# Altium PCB PCB_EmbeddedSystemDesign.PcbDoc
Units mm, origin at the board's own origin, x right, y up, seen from the top; angles counter-clockwise.
Board outline 63.31 x 64.64 mm, 2 copper layers (Top Layer, Bottom Layer); 49 components, 29 nets, 158 pads, 0 vias.
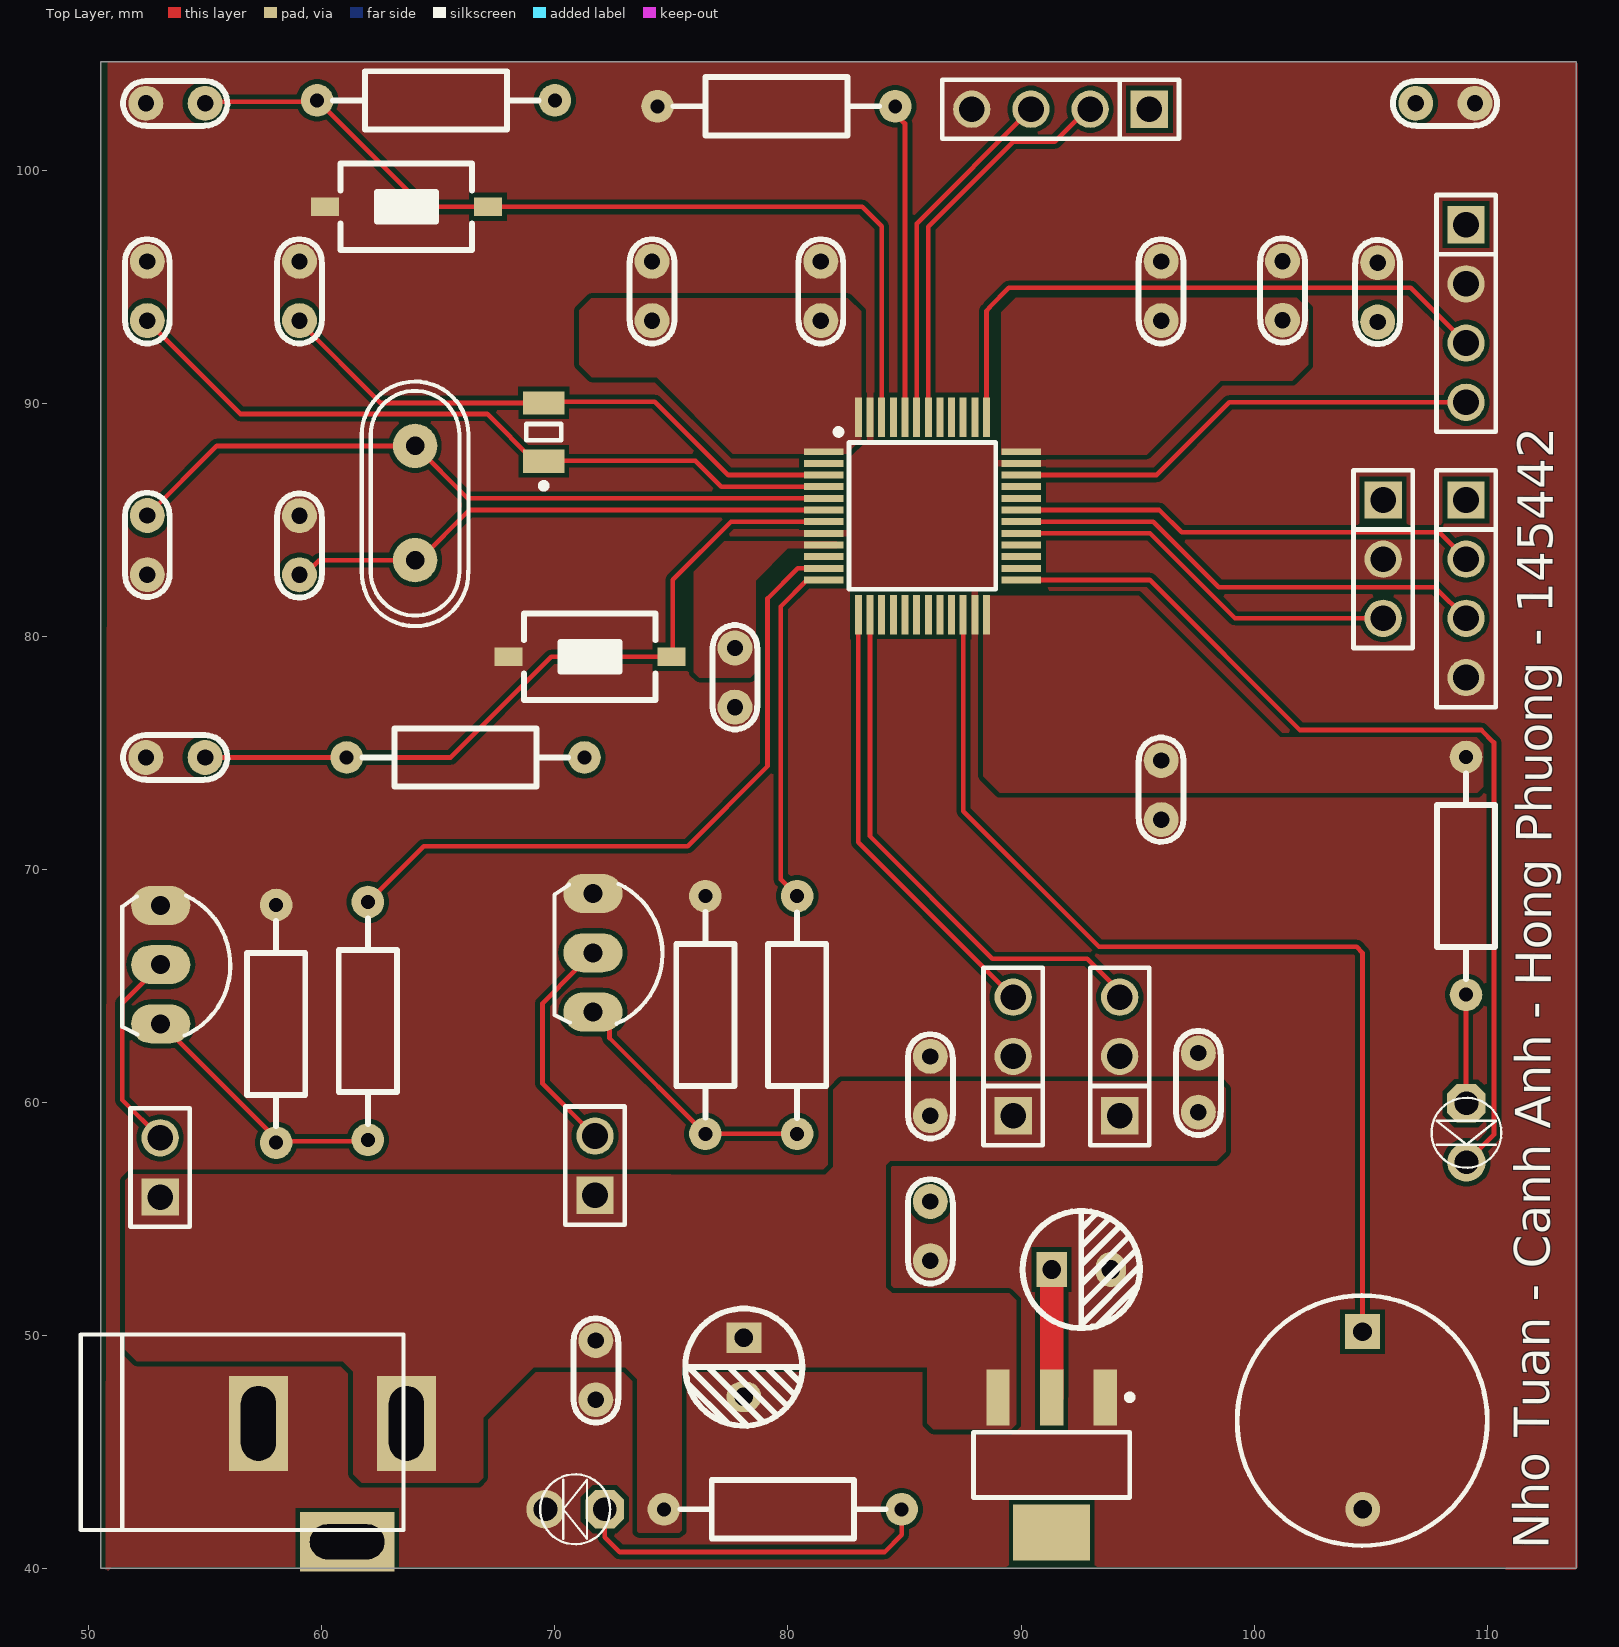
[diagram p0: Top Layer view]
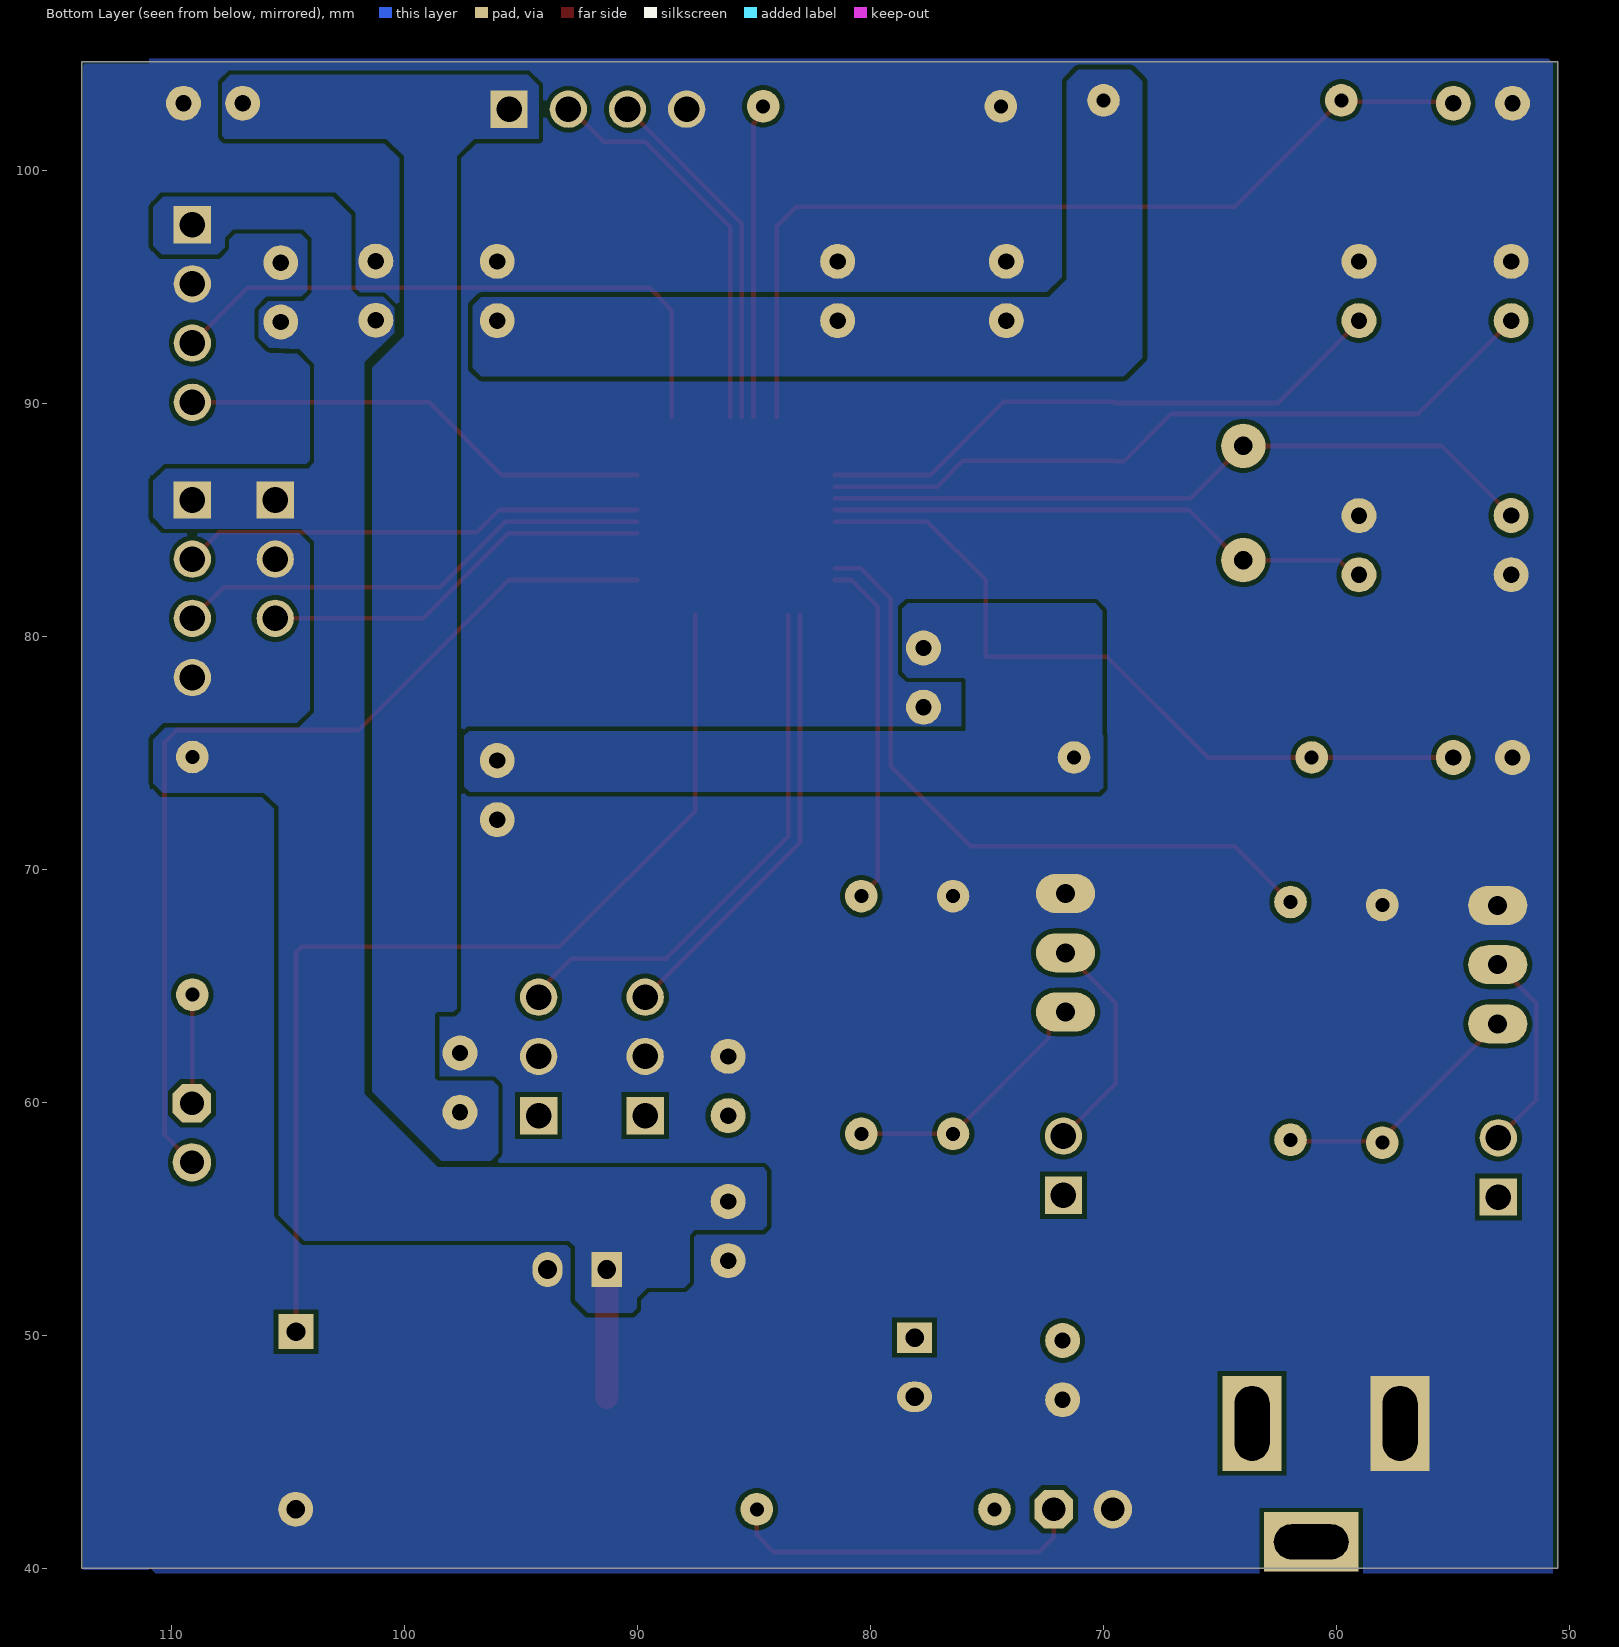
[diagram p1: Bottom Layer view, seen from below]
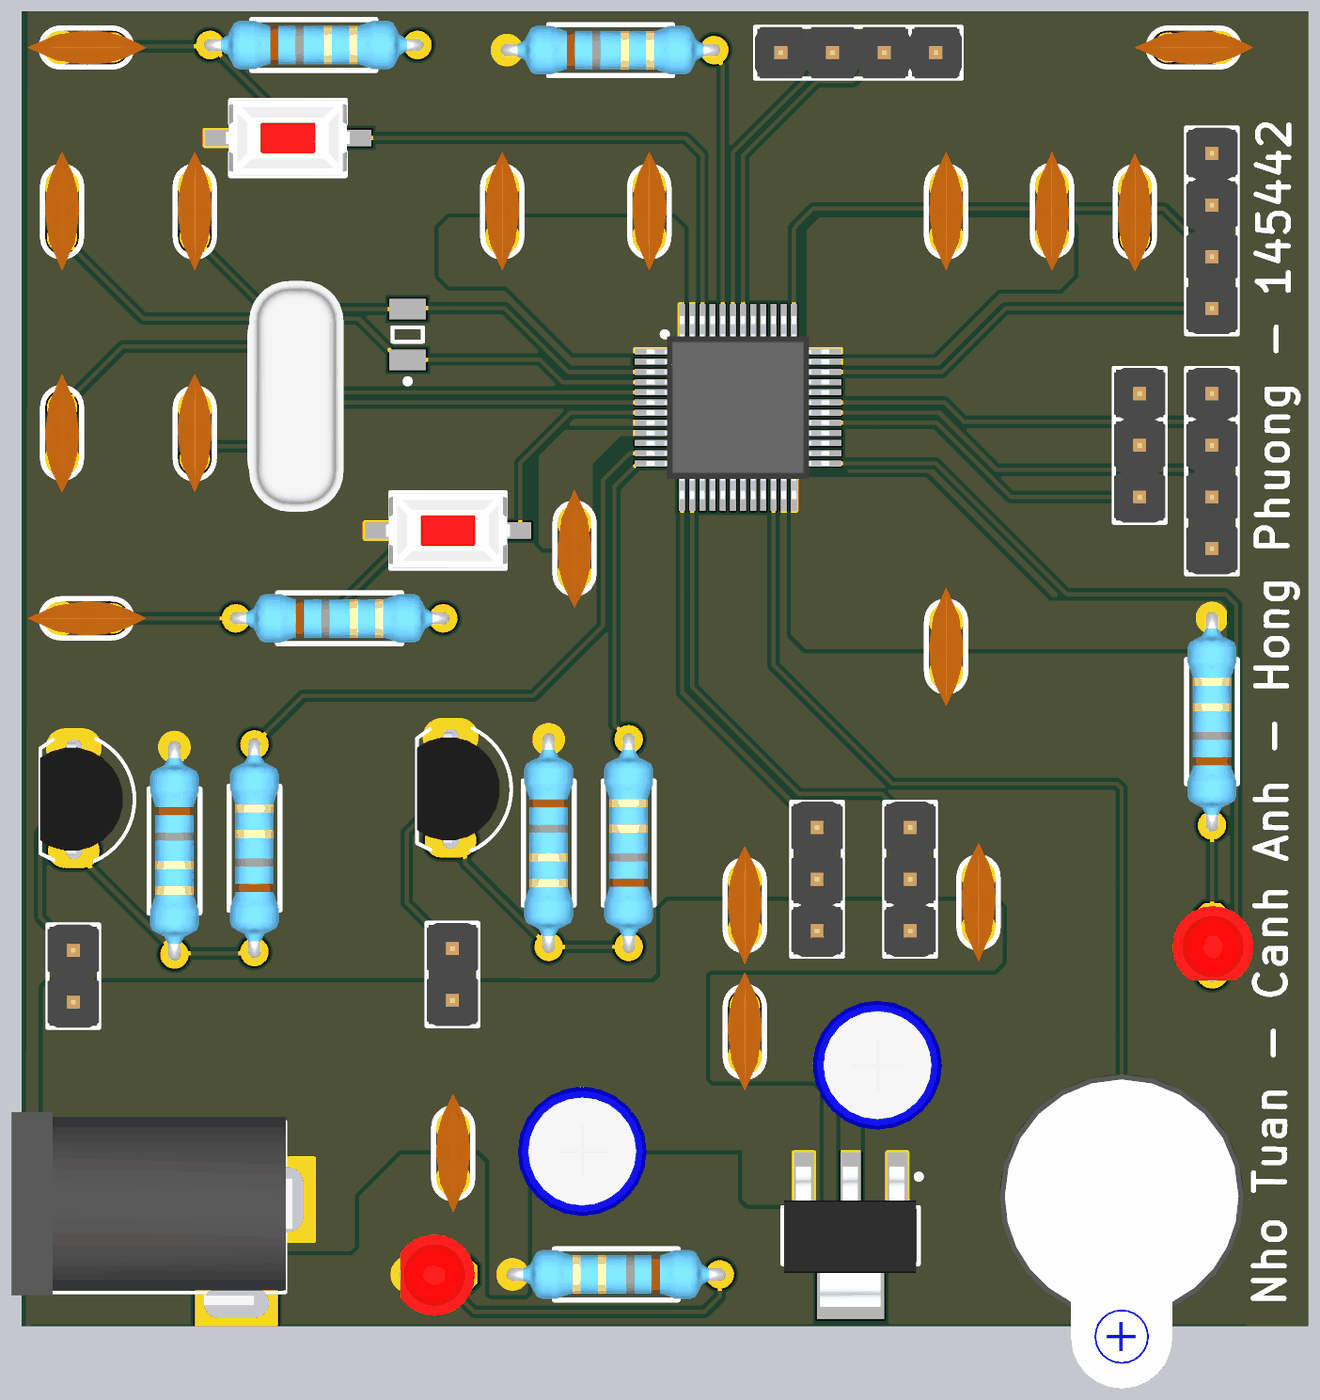
[diagram p2: 3D render of the assembled board from above, using the file's embedded part models]

## Layer stack, top to bottom
Top Solder: solder mask 0.0102, Solder Resist, Dk 3.5
Top Layer: signal copper 0.0356
Dielectric 1: dielectric 0.32, FR-4, Dk 4.8
Bottom Layer: signal copper 0.0356
Bottom Solder: solder mask 0.0102, Solder Resist, Dk 3.5

## Board outline
50.52,40.005 113.83,40.005 113.83,56.166 113.83,88.487 113.83,104.648 50.52,104.648

## Design rules (kind name [scope] priority, off if disabled: settings)
Clearance [All] p1: gap=0.2 ignorepadtopadclearanceinfootprint=FALSE
HoleSize [All] p1: absolutevalues=TRUE maxlimit=10 minlimit=0.2 maxpercent=80.000 minpercent=20.000
HoleToHoleClearance [All] p1: gap=0 allowstackedmicrovias=TRUE
MinimumSolderMaskSliver [All] p1: minsoldermaskwidth=0
PlaneClearance [All] p1: clearance=0.3
PolygonConnect [All] p1: connectstyle=Direct reliefconductorwidth=0.254 reliefentries=4 polygonreliefangle="90 Angle" airgapwidth=0.254
RoutingVias [All] p1: holewidth=0.3 width=0.6 viastyle="Through Hole" minholewidth=0.3 minwidth=0.2 maxholewidth=0.3 maxwidth=0.3
SilkToSilkClearance [All] p1: silktosilkclearance=0
SilkToSolderMaskClearance [IsPad] p1: minsilkscreentomaskgap=0 clearancetoexposedcopper=TRUE
SolderMaskExpansion [All] p1: expansion=0.102 istentingtop=FALSE
Width [All] p1: maxlimit=1 minlimit=0.2 preferedwidth=0.7
24 further rules are at their usual default settings.

## Classes and differential pairs
component class SchEmbeddedSystemDesign: C13 C18 X1 Y1

## Components (designator, comment, footprint, x,y, rotation, side; value= is the part's Value field where it differs from the comment)
BT1 "" "Nut Nhan 2 Chan SMD 3x6x2.5" 63.627,98.425 r0 top
BT2 "" "Nut Nhan 2 Chan SMD 3x6x2.5" 71.501,79.121 r0 top
C1 "" "tu gom" 86.106,60.706 r90 top
C2 "" "tu gom" 53.721,102.87 r0 top
C3 "" "tu gom" 108.204,102.87 r0 top
C4 "" "tu gom" 97.608,60.851 r90 top
C5 "" "tu gom" 81.407,94.817 r90 top
C6 "" "tu gom" 52.51,83.913 r270 top
C7 "" "tu gom" 74.168,94.817 r90 top
C8 "" "tu gom" 59.04,83.91 r90 top
C9 "" "tu gom" 96.012,94.817 r90 top
C10 "" "tu gom" 96.012,73.406 r270 top
C11 "" "tu gom" 59.04,94.817 r90 top
C12 "" "tu gom" 52.51,94.817 r90 top
C13 "" "tu gom" 77.724,78.232 r270 top
C14 "" "tu gom" 101.22,94.83 r270 top
C15 "" "tu gom" 105.3,94.76 r270 top
C16 "" "tu gom" 53.721,74.803 r0 top
C17 "" "tu hoa 5mm" 78.105,48.641 r270 top
C18 "" "tu hoa 5mm" 92.583,52.832 r0 top
C19 "" "tu gom" 71.755,48.514 r90 top
C20 "" "tu gom" 86.106,54.483 r90 top
IC1 "" SOT223-4N 91.313,44.45 r270 top value=LM317
"JACK DC1" "" "JACK DC 5.5" 60.452,43.688 r0 top value="Jac DC"
JP1 "" "JP 1x3 DT" 105.537,85.852 r270 top
JP2 "" "JP 1x3 DT" 89.662,59.436 r90 top
JP3 "" "JP 1x4 DT" 109.093,85.852 r270 top
JP4 "" "JP 1x4 DT" 95.504,102.616 r180 top
JP5 "" "JP 1x3 DT" 94.234,59.436 r90 top
JP6 "" "JP 1x2 DT" 53.06,55.94 r90 top
JP7 "" "JP 1x2 DT" 71.72,56.02 r90 top
JP8 "" "JP 1x4 DT" 109.093,97.663 r270 top
L1 "" LED-3MM-RED 109.11,59.97 r270 top
L2 "" LED-3MM-RED 72.136,42.545 r180 top
LS1 "" "Coi Chip Speacker" 104.648,50.165 r270 top
Q1 "" TO92 53.086,65.913 r270 top value=C9014
Q2 "" TO92 71.628,66.421 r270 top value=C9014
R1 "" "tro vach 1/4w" 64.897,102.997 r180 top
R2 "" "tro vach 1/4w" 79.502,102.743 r180 top
R3 "" "tro vach 1/4w" 61.976,63.5 r270 top
R4 "" "tro vach 1/4w" 58.039,63.373 r90 top
R5 "" "tro vach 1/4w" 80.391,63.754 r270 top
R6 "" "tro vach 1/4w" 76.454,63.754 r90 top
R7 "" "tro vach 1/4w" 109.093,69.723 r270 top
R8 "" "tro vach 1/4w" 79.776,42.545 r0 top
R9 "" "tro vach 1/4w" 66.167,74.803 r180 top
U1 "" LQFP-48_19.6_393_58X11_SMD 85.769,85.17 r0 top
X1 "" XT2-32.768KHz-2_V 69.52,88.76 r90 top value=4Mhz
Y1 "" "Thach Anh 2 chan cam" 64,85.72 r90 top value=4Mhz

## Footprints (in the part's own frame and the unit in brackets; to place one, negate y for a bottom-side part, rotate by r counter-clockwise, add the part's x,y. Pads: shape width x height; smd on the part's side, far side on the other; paste and mask are expansions set on the pad)
"Coi Chip Speacker" [mm]
  rect 1.5x1.5 hole 0.8: 1(0,0)
  round 1.5 hole 0.8: 2(7.62,0.013)
  silkscreen extent -1.55,-5.38 9.18,5.36, body extent -2.22,-6 13.24,6, height 4.5
"JACK DC 5.5" [mm] "Jac DC input"
  rect 2.54x4.064 hole 1.5 slot 3.2 at 90 deg: 1(3.175,2.54) 2(-3.175,2.54)
  rect 4.064x2.54 hole 1.5 slot 3.2 at 0 deg: 3(0.635,-2.54)
  silkscreen extent -10.79,-2.03 3.05,6.35, body extent -10.42,-2.67 3.4,6.84, height 11.02
"JP 1x2 DT" [mm] "2 pins, 1 row, straight, gold plating"
  rect 1.6x1.6 hole 1.1: 1(0,0)
  round 1.6 hole 1.1: 2(2.54,0)
  silkscreen extent -1.27,-1.27 3.81,1.27, body extent -1.27,-1.27 3.81,1.27, height 8.54
"JP 1x3 DT" [mm]
  rect 1.6x1.6 hole 1.1: 1(0,0)
  round 1.6 hole 1.1: 2(2.54,0) 3(5.08,0)
  silkscreen extent -1.27,-1.27 6.35,1.27, body extent -1.27,-1.27 6.35,1.27, height 8.54
"JP 1x4 DT" [mm] "4 pins, 1 row, straight, gold plating"
  rect 1.6x1.6 hole 1.1: 1(0,0)
  round 1.6 hole 1.1: 2(2.54,0) 3(5.08,0) 4(7.62,0)
  silkscreen extent -1.27,-1.27 8.89,1.27, body extent -1.27,-1.27 8.89,1.27, height 8.54
LED-3MM-RED [mil]
  oct 65x65 hole 40: 1(0,0)
  round 65 hole 40: 2(100,0)
  silkscreen extent -9,-59 109,59, body extent -27,-77 117,80, height 181
LQFP-48_19.6_393_58X11_SMD [mm] "48LQFP"
  rect 1.7x0.3 smd mask+0.076: 1(-4.238,2.75) 2(-4.238,2.25) 3(-4.238,1.75) 4(-4.238,1.25) 5(-4.238,0.75) 6(-4.238,0.25) 7(-4.238,-0.25) 8(-4.238,-0.75) 9(-4.238,-1.25) 10(-4.238,-1.75) 11(-4.238,-2.25) 12(-4.238,-2.75) 25(4.238,-2.75) 26(4.238,-2.25) 27(4.238,-1.75) 28(4.238,-1.25) 29(4.238,-0.75) 30(4.238,-0.25) 31(4.238,0.25) 32(4.238,0.75) 33(4.238,1.25) 34(4.238,1.75) 35(4.238,2.25) 36(4.238,2.75)
  rect 0.3x1.7 smd mask+0.076: 13(-2.75,-4.238) 14(-2.25,-4.238) 15(-1.75,-4.238) 16(-1.25,-4.238) 17(-0.75,-4.238) 18(-0.25,-4.238) 19(0.25,-4.238) 20(0.75,-4.238) 21(1.25,-4.238) 22(1.75,-4.238) 23(2.25,-4.238) 24(2.75,-4.238) 37(2.75,4.238) 38(2.25,4.238) 39(1.75,4.238) 40(1.25,4.238) 41(0.75,4.238) 42(0.25,4.238) 43(-0.25,4.238) 44(-0.75,4.238) 45(-1.25,4.238) 46(-1.75,4.238) 47(-2.25,4.238) 48(-2.75,4.238)
  silkscreen extent -3.72,-3.15 3.15,3.72, body extent -4.5,-4.5 4.5,4.5, height 1.7
"Nut Nhan 2 Chan SMD 3x6x2.5" [mm] "Switch SMD type"
  rect 1.2x0.8 smd: 1(-3.5,0) 2(3.5,0)
  silkscreen extent -2.82,-1.85 2.82,1.85, body extent -3.05,-1.85 3.05,1.85, height 2.5
SOT223-4N [mm] "SOT223, 4-Leads, Body 6.5x3.5mm, Pitch 2.3mm, Lead Span 7mm, IPC Medium Density"
  rect 2.4x1 smd: 1(-2.9,2.3) 2(-2.9,0) 3(-2.9,-2.3)
  rect 2.4x3.3 smd: 4(2.9,0)
  silkscreen extent -3.02,-3.35 1.4,3.48, body extent -3.39,-3.27 3.5,3.23, height 1.72
"Thach Anh 2 chan cam" [mm]
  round 1.905 hole 0.8: 1(-2.45,0) 2(2.45,0)
  silkscreen extent -5.28,-2.29 5.21,2.29, body extent -5.68,-2.36 5.68,2.29, height 3.5
TO92 [mil] "TO-92"
  oval 66x100 hole 32: 1(-100,0) 2(0,0) 3(100,0)
  silkscreen extent -117,-65 120,118, body extent -109,-66 109,95, height 245
"tro vach 1/4w" [mm]
  round 1.4 hole 0.6: 1(-5.1,0) 2(5.1,0)
  silkscreen extent -4.39,-1.25 4.42,1.25, body extent -5.38,-1.2 5.38,1.2, height 2.41
"tu gom" [mm] "Tu gom mini"
  round 1.5 hole 0.7: 1(-1.27,0) 2(1.27,0)
  silkscreen extent -2.25,-0.97 2.22,0.97, body extent -2.92,-0.85 2.92,0.85, height 6.12
"tu hoa 5mm" [mm]
  rect 1.3x1.5 hole 0.8: 1(-1.27,0)
  oval 1.3x1.5 hole 0.8: 2(1.27,0)
  silkscreen extent -2.51,-2.51 2.51,2.51, body extent -3.12,-3.18 3.23,3.18, height 14.55
XT2-32.768KHz-2_V [mm] "Hand Drawn, 2-Leads, Body 3.2x1.5mm, Pitch 2.5mm"
  rect 1x1.8 smd: 1(-1.25,0) 2(1.25,0)
  silkscreen extent -2.43,-0.75 0.35,0.75, body extent -1.6,-0.75 1.6,0.75, height 0.9

## Part data
BT1 BT2: library part "Nut Nhan 2 Chan SMD 3x6x2.5", "Nut Nhan 2 Chan SMD 3x6x2.5", Ma_Hang=MH001036, Ten="Nút Nhấn 2 Chân 3x6x2.5MM SMD"
C1 C2 C3 C4 C5 C7 C9 C10 C13 C14 C15 C16 C19 C20: library part "Tu gom 104 50V", "Cắm", Chung_Loai=Cắm, Don_Vi=Con, Ma_Hang=MH004761, So_Chan=2, Ten_Linh_Kien="Tụ gốm 104 100nF 50V"
C6 C8 C11 C12: library part "Tu gom 22pF 50V", "Cắm", Chung_Loai=Cắm, Don_Vi=Con, Ma_Hang=MH004771, So_Chan=2, Ten_Linh_Kien="Tụ gốm 22P 50V"
C17 C18: library part "Tu Hoa 100uF 16V 5x11", "Cắm", Chung_Loai=Cắm, Don_Vi=Con, Ma_Hang=MH008417, So_Chan=2, Ten_Linh_Kien="Tụ Hóa 100uF 16V 5x11MM"
IC1: library part LM1117, "Available in 1.8V, 2.5V, 2.85V, 3.3V, 5V, and  Adjustable Versions"
"JACK DC1": library part "JACK DC 5.5", "JACK DC 5.5"
JP1 JP2 JP5: library part "JP 1x3 2.54 Duc Thang", "Cắm", Chung_Loai=Cắm, Don_Vi=Con, Ma_Hang=MH000903, Ten_Linh_Kien="Jump Đơn Đực 2.54MM 1x40P Thẳng 11MM"
JP3 JP4 JP8: library part "JP 1x4 2.54 Duc Thang", "Cắm", Chung_Loai=Cắm, Don_Vi=Con, Ma_Hang=MH000903, Ten_Linh_Kien="Jump Đơn Đực 2.54MM 1x40P Thẳng 11MM"
JP6 JP7: library part "JP 1x2 2.54 Duc Thang", "Cắm", Chung_Loai=Cắm, Don_Vi=Con, Ma_Hang=MH000903, Ten_Linh_Kien="Jump Đơn Đực 2.54MM 1x40P Thẳng 11MM"
L1 L2: library part "LED 3mm Do", "Cắm", Chung_Loai=Cắm, Don_Vi=Con, Ma_Hang=MH003892, Ten_Linh_Kien="Led 3MM Phủ Đỏ (10c)"
LS1: library part "Coi Chip Speaker", "Còi chip"
Q1 Q2: library part C1815, "NPN transistor"
R1 R2 R4 R6 R9: library part "Tro Vach 1/4W 1% 10k", "Cắm", Chung_Loai=Cắm, Don_Vi=Con, Ma_Hang=MH006349, So_Chan=2, Ten_Linh_Kien="Trở Vạch 1/4w 1% 10k"
R3 R5 R8: library part "Tro Vach 1/4W 5% 1k", "Cắm", Chung_Loai=Cắm, Don_Vi=Con, Ma_Hang=MH007390, So_Chan=2, Ten_Linh_Kien="Trở Vạch 1/4w 5% 1k"
R7: library part "Tro Vach 1/4W 5% 220R", "Cắm", Chung_Loai=Cắm, Don_Vi=Con, Ma_Hang=MH007300, So_Chan=2, Ten_Linh_Kien="Trở Vạch 1/4w 5% 220R"
U1: library part IC_STM32F103C8T6, "ARM® Cortex®-M3 STM32F1 Microcontroller IC 32-Bit 72MHz 64KB (64K x 8) FLASH 48-LQFP (7x7)", Alternate Part Number-1=NA, Case/Package=LQFP48, Manufacturer=STMicroelectronics, Manufacturer Part Number=STM32F103C8T6, Supplier Part Number-1=STM32F103C8T6, Supplier-1=LCSC
X1: library part XT2, "Crystal, 32.768 KHz, -40 to 85 degC, 3.2 x 1.5 x 0.9 mm SMD"
Y1: library part "Thach Anh 2 chan Cam", "Crystal For all Crystal 2pin."

## Nets (pads, with @x,y where several pads share a name; then routed paths per layer and width w, separated by ;. In a path a pad name is that pad's centre, name@x,y a point inside that pad or via, vN(x,y) a via of type N, cw(c..) or ccw(c..) an arc to the next point about the centre after c; other vN are vias at no path point)
3.3V: C5.1 C7.1 C9.1 C10.1 C13.1 C14.2 C15.2 C18.1 C20.2 IC1.2 JP1.1 JP3.1 JP8.1 R1.1 R7.1 R9.1 U1.1 U1.9 U1.24 U1.36 U1.48 | length 5.8
  Top Layer w1: IC1.2 C18.1 ; JP1.1 JP1.1@105.791,85.598
5V: "JACK DC1.1" C1.1 C3.1 C4.1 C17.1 C19.2 IC1.3 JP2.1 JP4.1 JP5.1 JP6.1 JP7.1 R8.1
BOOT0: R2.1 U1.44 | length 13.5
  Top Layer w0.2: R2.1 84.602,102.418 85.019,102.001 U1.44
BUTTON: BT1.2 C2.2 R1.2 U1.46 | length 39.5
  Top Layer w0.2: C2.2 55.054,102.933 59.734,102.933 R1.2 64.369,98.425 BT1.2 83.185,98.425 84.019,97.591 U1.46
BUZZER: LS1.1 U1.22 | length 44.3
  Top Layer w0.2: U1.22 87.519,72.501 93.345,66.675 104.394,66.675 104.648,66.421 LS1.1
DHT22: JP1.3 U1.29 | length 17
  Top Layer w0.2: U1.29 95.532,84.42 99.18,80.772 JP1.3
GND: "JACK DC1.2" BT1.1 BT2.1 C1.2 C2.1 C3.2 C4.2 C5.2 C6.2 C7.2 C8.2 C9.2 C10.2 C11.2 C12.2 C13.2 C14.1 C15.1 C16.1 C17.2 C18.2 C19.1 C20.1 IC1.1 JP1.2 JP2.2 JP3.4 JP4.4 JP5.2 JP8.2 L2.2 LS1.2 Q1.1 Q2.1 R2.2 R4.2 R6.2 U1.8 U1.23 U1.35 U1.47
LED_PRO: L1.2 U1.25 | length 41.7
  Top Layer w0.2: U1.25 95.52,82.42 101.96,75.98 109.753,75.98 110.29,75.443 110.29,58.609 L1.2
NetJP6_2: JP6.2 Q1.2 | length 8.8
  Top Layer w0.2: JP6.2 51.435,60.105 51.435,64.262 52.372,65.199 52.372,65.231 53.054,65.913 Q1.2
NetJP7_2: JP7.2 Q2.2 | length 9.7
  Top Layer w0.2: Q2.2 71.596,66.421 70.914,65.739 70.914,65.707 69.469,64.262 69.469,60.811 JP7.2
NetL1_1: L1.1 R7.2 | length 4.7
  Top Layer w0.2: L1.1@109.093,59.944 R7.2
NetL2_1: L2.1 R8.2 | length 15.6
  Top Layer w0.2: L2.1 72.136,41.354 72.78,40.71 84.14,40.71 84.876,41.446 R8.2
NetQ1_3: Q1.3 R3.2 R4.1 | length 11.4
  Top Layer w0.2: Q1.3@52.832,63.373 53.101,63.373 58.039,58.435 R4.1 58.102,58.337 61.912,58.337 R3.2
NetQ2_3: Q2.3 R5.2 R6.1 | length 11.2
  Top Layer w0.2: Q2.3 71.66,63.881 72.342,63.199 72.342,62.766 R6.1 R5.2
OSC32_IN: C11.1 U1.3 X1.2 | length 25.3
  Top Layer w0.2: C11.1 59.04,93.493 62.523,90.01 X1.2 69.57,90.06 74.29,90.06 77.43,86.92 U1.3
OSC32_OUT: C12.1 U1.4 X1.1 | length 32
  Top Layer w0.2: C12.1 52.51,93.537 56.505,89.542 67.088,89.542 69.12,87.51 X1.1 69.54,87.53 76.03,87.53 77.14,86.42 U1.4
OSC_IN: C6.1 U1.5 Y1.2 | length 31.2
  Top Layer w0.2: C6.1 55.497,88.17 Y1.2 66.25,85.92 U1.5
OSC_OUT: C8.1 U1.6 Y1.1 | length 23.6
  Top Layer w0.2: C8.1 59.265,82.64 59.895,83.27 Y1.1 64.18,83.27 66.33,85.42 U1.6
PA3: JP2.3 U1.13 | length 19.2
  Top Layer w0.2: U1.13 83.019,71.159 JP2.3
PA4: JP5.3 U1.14 | length 23.2
  Top Layer w0.2: U1.14 83.519,71.421 88.773,66.167 92.837,66.167 94.234,64.77 JP5.3
PWM1: R3.1 U1.11 | length 29.7
  Top Layer w0.2: R3.1 64.369,70.993 75.692,70.993 79.121,74.422 79.121,81.621 80.42,82.92 U1.11
PWM2: R5.1 U1.12 | length 15
  Top Layer w0.2: R5.1 80.391,68.868 79.691,69.568 79.691,81.28 80.831,82.42 U1.12
RESET: BT2.2 C16.2 R9.2 U1.7 | length 32.6
  Top Layer w0.2: C16.2 R9.2 65.532,74.803 69.85,79.121 BT2.2 75.057,79.177 75.057,82.423 77.554,84.92 U1.7
RX: JP3.2 U1.31 | length 20
  Top Layer w0.2: U1.31 95.936,85.42 96.89,84.466 107.939,84.466 JP3.2
SCL: JP4.2 U1.42 | length 17.2
  Top Layer w0.2: U1.42 86.019,97.569 89.669,101.219 91.44,101.219 92.837,102.616 JP4.2
SDA: JP4.3 U1.43 | length 15.2
  Top Layer w0.2: U1.43 85.519,97.711 JP4.3
SWCLK: JP8.3 U1.37 | length 26.5
  Top Layer w0.2: U1.37 88.519,93.968 88.646,94.095 88.646,94.122 89.474,94.95 106.726,94.95 JP8.3
SWDIO: JP8.4 U1.34 | length 20.4
  Top Layer w0.2: U1.34 95.81,86.92 98.933,90.043 JP8.4
TX: JP3.3 U1.30 | length 20.8
  Top Layer w0.2: U1.30 95.674,84.92 98.482,82.112 107.753,82.112 JP3.3
pads on no net: "JACK DC1.3" IC1.4 U1.2 U1.10 U1.15 U1.16 U1.17 U1.18 U1.19 U1.20 U1.21 U1.26 U1.27 U1.28 U1.32 U1.33 U1.38 U1.39 U1.40 U1.41 U1.45

## Polygon pours and split planes (outlines as drawn)
GND on Top Layer "GND_L01_P021" (solid, pour order 21): 110.95,104.646 110.805,104.501 110.805,39.945 113.775,39.945 113.88,40.05 113.88,104.65
GND on Top Layer "GND_L01_P020" (solid, pour order 20): 50.815,104.685 110.855,104.685 110.95,104.78 110.95,40.09 51.01,40.09 50.72,39.8
3.3V on Top Layer "3.3V_L01_P018" (solid, pour order 18): 83.14,88.46 83.14,93.94 82.57,94.51 71.55,94.51 71.04,94 71.04,91.65 71.58,91.11 74.37,91.11 77.64,87.84 82.52,87.84
3.3V on Top Layer "3.3V_L01_P017" (solid, pour order 17): 89.16,87.81 89.17,87.8 95.39,87.8 98.56,90.97 101.638,90.97 102.32,91.652 102.32,94.04 101.83,94.53 89.78,94.53 89.16,93.91
5V on Top Layer "Top Layer-5V" (solid, pour order 6): 73.025,48.641 73.533,48.133 73.533,41.597 73.601,41.529 75.329,41.529 75.438,41.638 75.438,48.641 85.979,48.641 85.979,46.228 86.233,45.974 89.574,45.974 89.789,46.189 89.789,51.511 89.484,51.816 84.464,51.816 84.2,52.08 84.2,57.3 84.39,57.49 98.39,57.49 98.79,57.89 98.79,60.6 98.48,60.91 82.31,60.91 81.94,60.54 81.94,57.24 81.6,56.9 74.98,56.9 74.97,56.91 51.82,56.91 51.562,56.652 51.562,55.499 51.562,49.393 52.06,48.895 60.892,48.895 61.341,48.446 61.341,44.049 61.702,43.688 66.708,43.688 66.918,43.898 66.918,46.471 69.088,48.641
3.3V on Top Layer "3.3V_L01_P012" (solid, pour order 12): 88.37,81.75 88.37,74 89.08,73.29 109.58,73.29 109.83,73.54 109.83,75.38 109.55,75.66 101.13,75.66 95.04,81.75
3.3V on Top Layer "3.3V_L01_P011" (solid, pour order 11): 82.1,83.77 82.1,84.07 77.26,84.07 75.96,82.77 75.96,78.46 76.19,78.23 78.39,78.23 78.62,78.46 78.62,82.39 80,83.77
GND on Bottom Layer "GND_L02_P022" (solid, pour order 22): 110.877,104.573 113.867,104.573 113.88,104.56 113.775,104.455 113.775,39.945 110.805,39.945 110.95,40.09
GND on Bottom Layer "GND_L02_P019" (solid, pour order 19): 50.72,104.59 50.91,104.78 110.95,104.78 110.95,40.09 110.66,39.8 50.72,39.8
3.3V on Bottom Layer "3.3V_L02_P016" (solid, pour order 16): 68.82,104.31 68.33,103.82 68.33,91.95 69.13,91.15 96.69,91.15 97.06,91.52 97.06,94.19 96.7,94.55 72.34,94.55 71.57,95.32 71.57,103.82 71.08,104.31
3.3V on Bottom Layer "3.3V_L02_P015" (solid, pour order 15): 84.586,57.21 84.44,57.025 84.44,54.7 84.61,54.53 87.54,54.53 87.76,54.31 87.76,52.29 87.99,52.06 89.571,52.06 90.03,51.601 90.03,51.16 90.22,50.97 92.13,50.97 92.67,51.51 92.67,53.8 92.942,54.072 104.292,54.072 105.39,55.171 105.39,56.67 105.39,72.699 106.031,73.29 110.37,73.29 110.78,73.7 110.78,75.56 110.26,76.08 104.53,76.08 103.86,76.75 103.86,79.4 103.86,84.059 104.421,84.62 110.3,84.62 110.78,85.1 110.78,86.674 110.226,87.2 104.13,87.2 103.86,87.47 103.86,91.68 104.494,92.314 105.795,92.375 106.237,92.817 106.237,93.983 105.84,94.38 104.34,94.38 103.97,94.75 103.97,97.08 104.36,97.47 107.34,97.47 107.71,97.1 107.71,96.684 108.001,96.393 110.413,96.393 110.78,96.76 110.78,98.425 110.345,98.86 103.07,98.86 102.28,98.07 102.28,97.65 102.28,94.86 101.98,94.56 100.91,94.56 100.44,94.09 100.44,93.02 101.689,91.771 101.72,91.743 101.72,60.37 98.56,57.21
5V on Bottom Layer "5V_L02_P013" (solid, pour order 13): 96.198,60.925 95.978,60.705 95.978,57.825 96.298,57.505 98.415,57.505 101.38,60.47 101.38,91.533 100.008,92.905 100.008,100.588 100.766,101.346 107.709,101.346 107.81,101.495 107.81,102.623 107.81,103.74 107.46,104.09 94.71,104.09 94.234,103.614 94.234,101.346 97.007,101.346 97.752,100.601 97.752,64.028 97.889,63.891 98.579,63.891 98.683,63.787 98.683,61.037 98.572,60.925
3.3V on Bottom Layer "Bottom Layer-3.3V" (solid, pour order 10): 70.013,73.513 70.203,73.323 97.193,73.323 97.419,73.549 97.419,75.731 97.217,75.933 84.583,75.933 75.953,75.933 75.903,75.983 75.903,78.143 75.993,78.233 78.393,78.233 78.633,78.473 78.633,81.183 78.403,81.413 70.363,81.413 70.043,81.093 70.043,75.773 70.013,75.743

## Silkscreen, mask and mechanical layers (free items; w line width, h text height)
Top Overlay:
  text "Nho Tuan - Canh Anh - Hong Phuong - 145442" at 112.649,40.837 h1.52 r89.76